# EAGLE board adafruit-as5600 (EAGLE 9.6.2)
REV: A
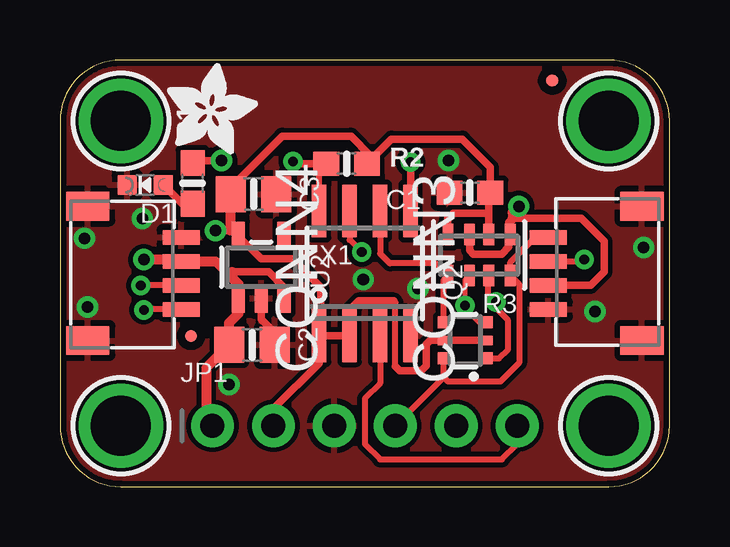
[diagram p0: board, top side]
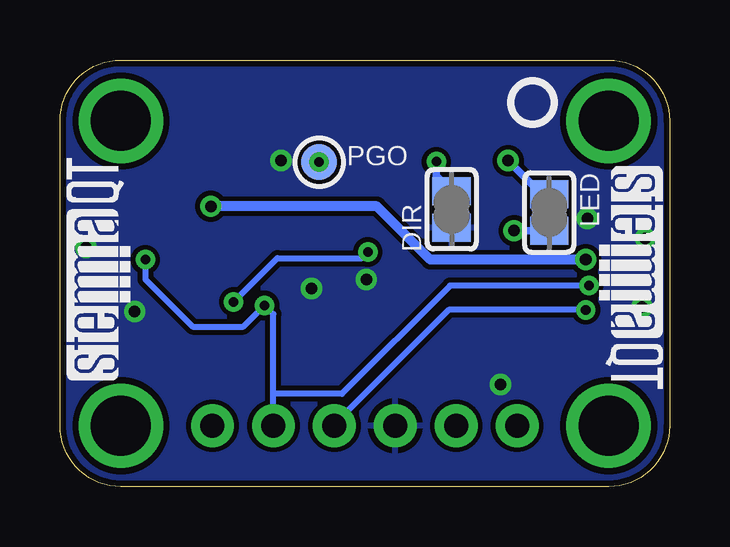
[diagram p1: board, bottom side, seen from below]

Size 25.4 x 17.78 mm. Coordinates in mm from the lower left corner, seen from the top.
Outline: 0,15.24 0,2.54 arc90 2.54,0 22.86,0 arc90 25.4,2.54 25.4,15.24 arc90 22.86,17.78 2.54,17.78 arc90 0,15.24
Copper layers (1*16): Top 0.035mm / dielectric 1.5mm / Bottom 0.035mm
Design rules "adafruit *": minimum track width 8mil, minimum drill 15.5mil, track to track 8mil, track to pad 8mil, pad to pad 8mil, via to via 8mil, smd to smd 8mil, copper to edge 10mil, drill to drill 8mil, minimum pad ring 10mil, minimum via ring 8mil, stop-mask expansion 2mil, vias tented up to drill 20mil, thermal gap 10mil
Net classes: 1 highpower: width 0.305 mm, drill 0.483 mm; 2 lowpower: width 0.305 mm, drill 0.483 mm

## Footprints (pad centres in the part's own frame; a part is rotated, then mirrored left to right if it is on the bottom)
0603-NO = smd 1.075 x 1: 1 -0.85,0; 2 0.85,0
0805-NO = smd 1.24 x 1.5: 1 -0.95,0; 2 0.95,0
JST_SH4 = smd 0.6 x 1.55: 1 -1.5,2.006; 2 -0.5,2.006; 3 0.5,2.006; 4 1.5,2.006 | smd 1.2 x 1.8: MT1 -2.8,-1.894; MT2 2.8,-1.894
CHIPLED_0603_NOOUTLINE = smd 0.8 x 0.8: A 0,-0.75; C 0,0.75
SOLDERJUMPER_CLOSEDWIRE = smd 1.168 x 1.6: 1 -0.762,0; 2 0.762,0 | smd 0.635 x 0.203: WIRE 0,0
FIDUCIAL_0.5MM = smd 0.5 x 0.5: 1 0,0
1X06_ROUND_70 = drill 1 pad 1.778: 1 -6.35,0; 2 -3.81,0; 3 -1.27,0; 4 1.27,0; 5 3.81,0; 6 6.35,0
TESTPOINT_ROUND_1.5MM = smd 1.5 x 1.5: P$1 0,0
SOT363 = smd 0.5 x 0.5: 1 -0.75,-0.9; 3 0.75,-0.9; 4 0.75,0.9; 6 -0.75,0.9 | smd 0.4 x 0.5: 2 0,-0.9; 5 0,0.9
RESPACK_4X0603 = smd 0.45 x 0.9: 1 -1.3,-0.85; 2 -0.4,-0.85; 3 0.4,-0.85; 4 1.3,-0.85; 5 1.3,0.85; 6 0.4,0.85; 7 -0.4,0.85; 8 -1.3,0.85
SOT23-5 = smd 0.55 x 1.2: 1 -0.95,-1.3; 2 0,-1.3; 3 0.95,-1.3; 4 0.95,1.3; 5 -0.95,1.3
MOUNTINGHOLE_2.5_PLATED = drill 2.5 pad 3.2: P$1 0,0
SOIC8_150MIL = smd 0.6 x 2.2: 1 -1.905,-2.6; 2 -0.635,-2.6; 3 0.635,-2.6; 4 1.905,-2.6; 5 1.905,2.6; 6 0.635,2.6; 7 -0.635,2.6; 8 -1.905,2.6

## Placement (x,y rotation side)
C1  0.1uF  [0603-NO]  17.08,12.26 180 top
C2  10uF  [0805-NO]  8,5.91 0 top
C3  10uF  [0805-NO]  8.06,12.19 0 top
CONN3  STEMMA_I2C_QT  [JST_SH4]  22.35,8.89 90 top
CONN4  STEMMA_I2C_QT  [JST_SH4]  3.05,8.89 270 top
D1  GREEN  [CHIPLED_0603_NOOUTLINE]  3.56,12.57 90 top
DIR  [SOLDERJUMPER_CLOSEDWIRE]  9.08,11.56 90 bottom
FID3  FIDUCIAL_0.5MM  [FIDUCIAL_0.5MM]  5.46,6.29 0 top
FID4  FIDUCIAL_0.5MM  [FIDUCIAL_0.5MM]  20.51,16.93 0 top
JP1  [1X06_ROUND_70]  12.7,2.54 0 top
LED  [SOLDERJUMPER_CLOSEDWIRE]  5.02,11.43 270 bottom
PGO  [TESTPOINT_ROUND_1.5MM]  14.61,13.53 0 bottom
PLABEL0  [PLABEL0]  6.35,0.89 0 top
PLABEL1  [PLABEL1]  8.95,4.19 0 top
PLABEL2  [PLABEL2]  11.56,0.89 0 top
PLABEL3  [PLABEL3]  13.97,4.19 0 top
PLABEL4  [PLABEL4]  16.64,0.89 0 top
PLABEL5  [PLABEL5]  19.05,4.19 0 top
PLABEL6  [PLABEL6]  13.84,16.7 0 top
PLABEL7  [PLABEL7]  0.38,12.45 0 top
PLABEL8  [PLABEL8]  14.16,15.05 0 top
PLABEL9  [PLABEL9]  16.07,10.67 0 bottom
PLABEL10  [PLABEL10]  12.95,4.32 0 bottom
PLABEL11  [PLABEL11]  17.27,13.59 0 bottom
PLABEL12  [PLABEL12]  9.08,13.97 0 bottom
PLABEL13  [PLABEL13]  5.33,13.84 0 bottom
PLABEL14  [PLABEL14]  12.7,0.89 0 bottom
PLABEL15  [PLABEL15]  13.34,16.13 0 bottom
PLABEL16  [PLABEL16]  12.45,6.54 0 bottom
Q2  BSS138  [SOT363]  16.89,6.1 90 top
R1  10K  [0603-NO]  5.52,12.64 90 top
R2  10K  [0603-NO]  11.94,13.46 0 top
R3  10K Pack  [RESPACK_4X0603]  17.46,9.65 180 top
U2  AP2127K-3.3  [SOT23-5]  8.38,9.14 0 top
U$1  MOUNTINGHOLE2.5  [MOUNTINGHOLE_2.5_PLATED]  2.54,15.24 0 top
U$17  MOUNTINGHOLE2.5  [MOUNTINGHOLE_2.5_PLATED]  22.86,15.24 0 top
U$19  MOUNTINGHOLE2.5  [MOUNTINGHOLE_2.5_PLATED]  2.54,2.54 0 top
U$21  MOUNTINGHOLE2.5  [MOUNTINGHOLE_2.5_PLATED]  22.86,2.54 0 top
U$25  [PCBFEAT-REV-040]  5.71,16 0 bottom
U$30  [STEMMAQT]  22.48,4.45 90 bottom
U$31  [STEMMAQT]  2.92,13.34 270 bottom
U$32  [ADAFRUIT_3.5MM]  4.45,13.84 0 top
X1  AS5600  [SOIC8_150MIL]  12.7,8.89 0 top

## Library data of the parts
C1-C3 DIR FID3 FID4 JP1 LED PGO R1-R3 U$25 U$32 = microbuilder
CONN3 CONN4 = adafruit_electromech; LCSC: C2845363
D1 = microbuilder; ROT: 270
PLABEL0 PLABEL1-PLABEL16 = pinguin
Q2 = microbuilder; JLC_ROTATION: 270
U2 = adafruit_power; JLC_ROTATION: 270
U$1 U$17 U$19 U$21 = adafruit_electromech; BOM: EXCLUDE
U$30 U$31 = silks
X1 = adafruit_sensor

## Nets
3.3V [lowpower]: C1.1 C3.1 JP1.2 LED.2 Q2.2 Q2.5 R2.2 R3.2 R3.4 U2.5 X1.1 X1.2
DIR: DIR.2 R2.1 X1.8
GND [highpower]: C1.2 C2.2 C3.2 CONN3.1 CONN3.MT1 CONN3.MT2 CONN4.1 CONN4.MT1 CONN4.MT2 D1.C DIR.1 JP1.3 U2.2 X1.4
N$1: D1.A R1.1
N$2: PGO.P$1 X1.5
N$3 [lowpower]: LED.1 R1.2
PWMOUT: JP1.6 X1.3
SCL: CONN3.4 CONN4.4 JP1.4 Q2.6 R3.8
SCL_3V: Q2.1 R3.7 X1.7
SDA: CONN3.3 CONN4.3 JP1.5 Q2.3 R3.6
SDA_3V: Q2.4 R3.5 X1.6
VCC [lowpower]: C2.1 CONN3.2 CONN4.2 JP1.1 R3.1 R3.3 U2.1 U2.3

## Tracks (layer width: path | path; a pad name or v marks a point on that pad's centre or on a via)
3.3V  (via drill 0.48)
  Top 0.254: 13.91,7.75 13.97,7.68 13.97,5.02
  Top 0.305: Q2.2 Q2.5 15.43,6.1 15.26,5.93 15.26,5.04 15.05,4.83 14.16,4.83 13.97,5.02 | R3.2 17.86,11.43 | 17.86,11.43 17.86,12.19 C1.1 17.93,13.31 16.76,14.48 13.8,14.48 12.93,13.61 | R3.4 16.16,11.18 16.38,11.4 17.83,11.4 17.86,11.43 | X1.1 X1.2 12.06,7.37 12.45,7.75 13.91,7.75 | R2.2 12.93,13.61 | X1.1 10.79,5.14 8.89,3.24 JP1.2 | U2.5 8.39,9.49 9.69,9.49 10.86,8.32 10.86,6.35 X1.1 | C3.1 7.11,12.46 9.26,14.61 12.13,14.61 12.93,13.8 12.93,13.61 | v6.48,10.67 7.11,10.67 7.43,10.67
  Top 0.406: U2.5 7.43,10.67 | 7.11,10.67 C3.1
  Bottom 0.305: LED.2 v6.48,10.67
DIR  (via drill 0.4)
  Top 0.254: X1.8 10.79,13.17 R2.1
  Top 0.305: R2.1 9.8,13.46 v9.72,13.55
  Bottom 0.305: v9.72,13.55 9.72,12.95 DIR.2
GND  (via drill 0.48)
  Top 0.305: U2.2 8.38,6.99 8.95,6.42 C2.2
  other vias: 12.64,8.64 7.05,4.25 16.19,13.59 1.02,10.35 1.14,7.49 3.43,11.18 22.29,7.3 24.32,9.97 14.92,8.26
  pour Top: 0,17.78 25.4,17.78 25.4,0 0,0
  pour Bottom: 0,17.78 25.4,17.78 25.4,0 0,0
N$1
  Top 0.305: D1.A 5.16,11.72 5.46,11.72 R1.1
N$2  (via drill 0.4)
  Top 0.305: X1.5 PGO.P$1
  other vias: 14.61,13.53
N$3  (via drill 0.48)
  Top 0.305: R1.2 5.63,13.59 v6.73,13.59
  Bottom 0.305: v6.73,13.59 5.33,12.19 LED.1
PWMOUT
  Top 0.254: X1.3 13.34,4.32 12.7,3.68 12.7,1.78 13.34,1.14 18.41,1.14 19.05,1.78 JP1.6
SCL  (via drill 0.4)
  Top 0.254: JP1.4 15.99,4.56 | 15.99,4.56 Q2.6 | CONN3.4 19.79,10.39 19.32,9.92 19.32,9.91 18.76,9.36 R3.8 19.13,8.44 19.13,5.16 18.35,4.38 16.17,4.38 15.99,4.56 | CONN4.4 3.52,7.39 v3.49,7.37
  Bottom 0.254: v3.49,7.37 9.21,7.37 13.97,2.6 JP1.4
SCL_3V  (via drill 0.4)
  Top 0.254: Q2.1 18.3,5.35 18.67,5.71 18.67,6.93 18.14,7.47 | 18.14,7.47 17.84,7.76 17.84,8.78 R3.7 | 18.14,7.47 18.14,7.67 v18.17,7.7 | X1.7 12.06,10.29 v12.57,9.78
  Bottom 0.254: v18.17,7.7 16.34,9.53 12.83,9.53 v12.57,9.78
SDA  (via drill 0.4)
  Top 0.203: R3.6 16.87,8.61 v16.87,7.56 16.87,7.45 17.47,6.85 Q2.3
  Top 0.254: CONN3.3 21.77,9.39 v21.84,9.46 | CONN4.3 v3.37,8.39 v3.37,8.38
  Bottom 0.254: v21.84,9.46 21.84,8.64 19.88,6.67 17.76,6.67 v16.87,7.56 16.51,7.19 16.51,3.87 | JP1.5 16.51,3.87 | v3.37,8.38 9.14,8.38 13.65,3.87 16.51,3.87
SDA_3V
  Top 0.254: X1.6 13.34,9.72 13.74,9.31 15.65,9.31 R3.5 15.99,8.63 Q2.4
VCC  (via drill 0.48)
  Top 0.305: R3.3 17.06,9.86 17.23,9.7 18.4,9.7 18.7,10 18.7,10.44 | 18.7,10.44 R3.1 | CONN3.2 22.11,8.39 22.67,8.95 22.67,10.22 21.72,11.18 18.86,11.18 18.7,11.02 18.7,10.44 | U2.3 9.33,8.32 8.7,8.95 7.18,8.95
  Top 0.406: JP1.1 6.1,2.79 6.1,4.95 C2.1 7.05,6.83 7.43,7.21 U2.1 7.43,8.44 7.05,8.83 | 7.18,8.95 7.05,8.83 | 7.05,8.83 6.49,9.39 CONN4.2 4.98,9.46 v3.49,9.46 | v19.12,11.68 18.86,11.43 18.86,11.18
  Bottom 0.406: v3.49,9.46 9.97,9.46 12.19,11.68 v19.12,11.68

## Text on the board
Pinguin_tBackup: AS5600 | Mag Angle Sensor | on | 3Vo | SCL | OUT | VIN | GND | SDA
Pinguin_bBackup: AS5600 | LED | DIR | PGO | I2C Magnetic / Angle Sensor | w/PWM or analog out | I2C Addr: 0x36 | Vcc/logic: 3-5VDC